# EAGLE board picrocope_hub_v3r1 (EAGLE 9.6.2)
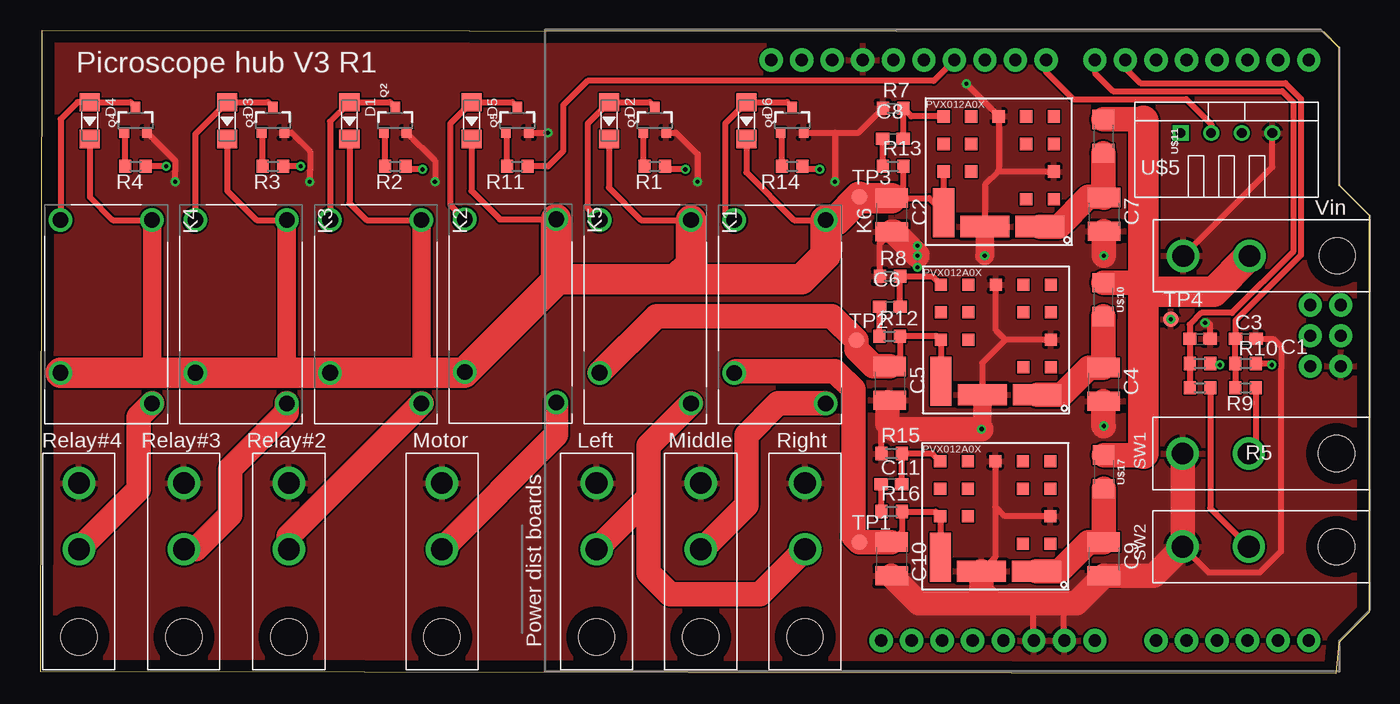
[diagram p0: board, top side]
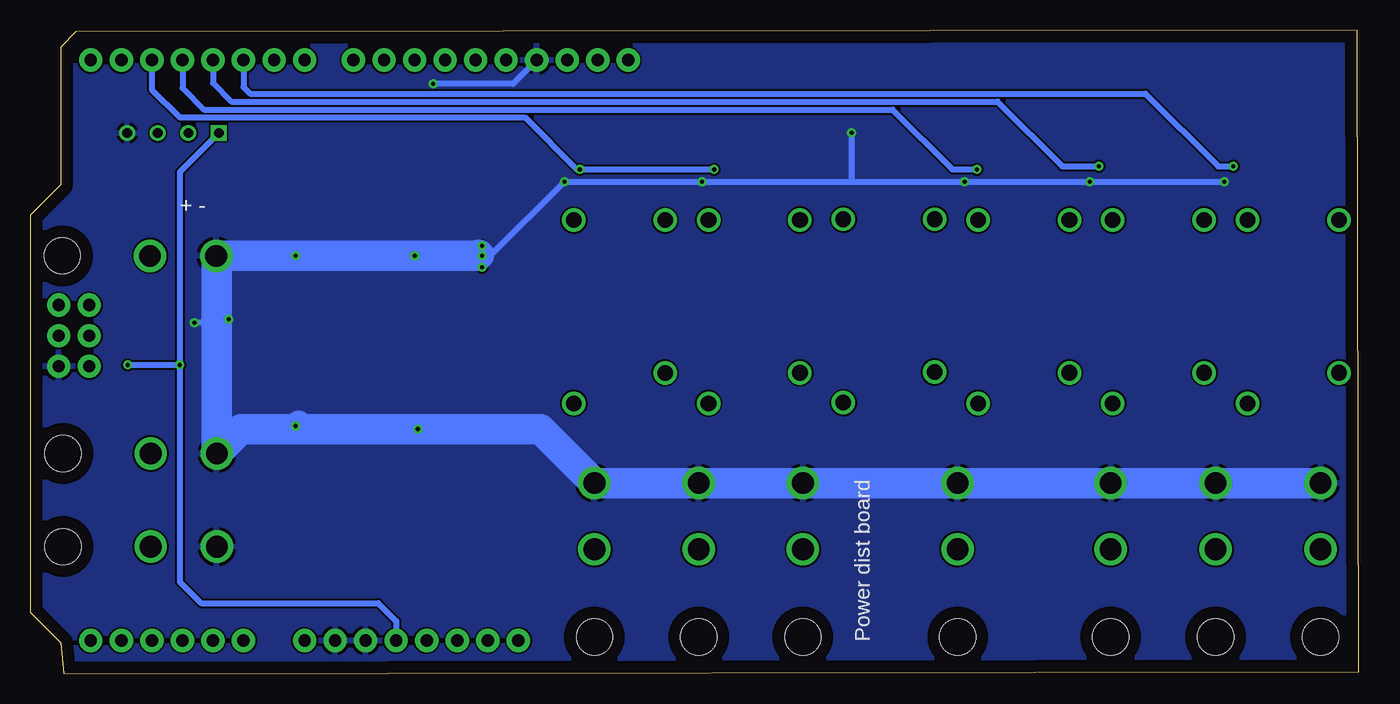
[diagram p1: board, bottom side, seen from below]

Size 110.49 x 53.49 mm. Coordinates in mm from the lower left corner, seen from the top.
Outline: 0,0.15 0.11,53.49 106.68,53.34 107.95,52.07 107.95,40.64 110.49,38.1 110.49,5.08 107.95,2.54 107.7,0 0,0.15
Copper layers (1*16): Top 0.035mm / dielectric 1.5mm / Bottom 0.035mm
Design rules "default *": minimum track width 20mil, minimum drill 0.35mm, track to track 6mil, track to pad 6mil, pad to pad 6mil, via to via 6mil, smd to smd 6mil, copper to edge 40mil, drill to drill 6mil, minimum pad ring 10mil, minimum via ring 8mil, stop-mask expansion 4mil, vias tented up to drill 0mil, thermal gap 10mil

## Footprints (pad centres in the part's own frame; a part is rotated, then mirrored left to right if it is on the bottom)
ARDUINO_R3 = drill 1.016 pad 1.93: 3.3V 2.54,-24.13; 5V 5.08,-24.13; A0 17.78,-24.13; A1 20.32,-24.13; A2 22.86,-24.13; A3 25.4,-24.13; A4 27.94,-24.13; A5 30.48,-24.13; AREF -9.144,24.13; D0 30.48,24.13; D1 27.94,24.13; D2 25.4,24.13; D3 22.86,24.13; D4 20.32,24.13; D5 17.78,24.13; D6 15.24,24.13; D7 12.7,24.13; D8 8.636,24.13; D9 6.096,24.13; D10 3.556,24.13; D11 1.016,24.13; D12 -1.524,24.13; D13 -4.064,24.13; GND@1 7.62,-24.13; GND@2 10.16,-24.13; GND@3 -6.604,24.13; GND@4 33.16,-1.32; IOREF -2.54,-24.13; MISO 30.62,3.76; MOSI 33.16,1.22; NC -5.08,-24.13; RESET@1 0,-24.13; RESET@2 30.62,-1.32; SCK 30.62,1.22; SCL -14.224,24.13; SDA -11.684,24.13; VCC 33.16,3.76; VIN 12.7,-24.13
C0603 = smd 1.1 x 1: 1 -0.85,0; 2 0.85,0
C1210 = smd 1.6 x 2.7: 1 -1.4,0; 2 1.4,0
LL-34 = smd 1.524 x 1.676: A -1.524,0; C 1.524,0
RELAY_2071508-1 = drill 1.3: 1 -7.85,3.8; 2 -7.85,-3.8; 3 7.39,3.8; 4 4.85,-3.8
SOT23-3 = smd 0.8 x 0.9: 1 -0.95,-1; 2 0.95,-1; 3 0,1.1
R0603 = smd 1 x 1.1: 1 -0.85,0; 2 0.85,0
B1,27 = smd 1.27 x 1.27: TP 0,0
PVX012A0X = smd 1.01 x 1.01: 8 3.81,1.52; 9 1.52,1.52; 11 3.81,3.81; 12 8.39,3.81; 13 8.39,6.1; 14 10.68,3.81; 15 8.39,1.52; 16 1.52,8.39; 17 3.81,8.39; GND 6.1,1.52; ON_OFF 1.52,6.1; PGOOD 1.52,3.81; SENSE 10.68,6.1; TRIM 10.68,1.52 | smd 4.07 x 1.77: GRN 7.24,10.67; VIN 2.67,10.67 | smd 1.77 x 4.07: VOUT 10.67,9.53
MINI-FIT_JR_CONN = drill 1.8: P$1 0,0; P$2 0,5.5 | hole 3: 0,-7.3
TEMP-HUM-SENSOR-DHT22 = drill 0.8 square: 1 -3.81,0 | drill 0.8: 2 -1.27,0; 3 1.27,0; 4 3.81,0
1206 = smd 1.6 x 1.8: 1 -1.4,0; 2 1.4,0

## Placement (x,y rotation side)
B1  ARDUINO_UNO_R3  [ARDUINO_R3]  74.96,26.87 0 top
C1  0.1uF  [C0603]  96.39,27.81 0 top
C2  47 uF  [C1210]  70.75,38.13 270 top
C3  0.1uF  [C0603]  100.2,27.81 0 top
C4  47 uF  [C1210]  88.37,24.04 270 top
C5  47 uF  [C1210]  70.59,24.12 270 top
C6  100pF  [C0603]  70.61,30.48 0 top
C7  47 uF  [C1210]  88.4,38.17 270 top
C8  100pF  [C0603]  70.87,44.45 0 top
C9  47 uF  [C1210]  88.39,9.53 270 top
C10  47 uF  [C1210]  70.74,9.53 270 top
C11  100pF  [C0603]  70.74,15.75 0 top
D1  1N4148  [LL-34]  25.65,45.97 270 top
D2  1N4148  [LL-34]  47.24,45.97 270 top
D3  1N4148  [LL-34]  15.49,45.97 270 top
D4  1N4148  [LL-34]  4.06,45.97 270 top
D5  1N4148  [LL-34]  35.81,45.97 270 top
D6  1N4148  [LL-34]  58.67,45.97 270 top
K1  2071508-1  [RELAY_2071508-1]  50.26,29.85 270 top
K2  2071508-1  [RELAY_2071508-1]  27.85,29.85 270 top
K3  2071508-1  [RELAY_2071508-1]  16.64,29.85 270 top
K4  2071508-1  [RELAY_2071508-1]  5.44,29.85 270 top
K5  2071508-1  [RELAY_2071508-1]  39.06,29.91 270 top
K6  2071508-1  [RELAY_2071508-1]  61.47,29.84 270 top
Q1  600mA/40V  [SOT23-3]  51.05,45.97 0 top
Q2  600mA/40V  [SOT23-3]  29.46,45.97 0 top
Q3  600mA/40V  [SOT23-3]  19.3,45.97 0 top
Q4  600mA/40V  [SOT23-3]  7.87,45.97 0 top
Q5  600mA/40V  [SOT23-3]  39.62,45.97 0 top
Q6  600mA/40V  [SOT23-3]  62.48,45.97 0 top
R1  1k  [R0603]  51.05,42.16 180 top
R2  1k  [R0603]  29.46,42.16 180 top
R3  1k  [R0603]  19.3,42.16 180 top
R4  1k  [R0603]  7.87,42.16 180 top
R5  1k  [R0603]  96.39,23.75 180 top
R6  10k  [R0603]  96.39,25.78 0 top
R7  2.727k  [R0603]  70.87,46.99 0 top
R8  2.727k  [R0603]  70.61,33.02 0 top
R9  1k  [R0603]  100.2,23.75 180 top
R10  10k  [R0603]  100.2,25.78 0 top
R11  1k  [R0603]  39.62,42.16 180 top
R12  330  [R0603]  70.58,28.03 0 top
R13  330  [R0603]  70.87,42.16 0 top
R14  1k  [R0603]  62.48,42.16 180 top
R15  2.727k  [R0603]  70.74,18.29 0 top
R16  330  [R0603]  70.74,13.46 0 top
TP1  PTR1B1,27  [B1,27]  68.07,10.92 0 top
TP2  PTR1B1,27  [B1,27]  67.82,27.69 0 top
TP3  PTR1B1,27  [B1,27]  68.07,39.62 0 top
TP4  PTR1B1,27  [B1,27]  93.98,29.46 0 top
U$1  PVX012A0XV1  [PVX012A0X]  85.75,47.83 180 top
U$2  PVX012A0XV1  [PVX012A0X]  85.52,33.84 180 top
U$3  MOLEX_0039301022  [MINI-FIT_JR_CONN]  100.51,34.72 90 top
U$4  PVX012A0XV1  [PVX012A0X]  85.47,19.18 180 top
U$5  TEMP-HUM-SENSOR-DHT22  [TEMP-HUM-SENSOR-DHT22]  98.6,44.94 0 top
U$6  MOLEX_0039301022  [MINI-FIT_JR_CONN]  46.21,10.33 0 top
U$7  MOLEX_0039301022  [MINI-FIT_JR_CONN]  20.62,10.33 0 top
U$8  MOLEX_0039301022  [MINI-FIT_JR_CONN]  11.89,10.33 0 top
U$9  MOLEX_0039301022  [MINI-FIT_JR_CONN]  3.15,10.33 0 top
U$10  PTC_1206  [1206]  88.34,31.09 270 top
U$11  PTC_1206  [1206]  88.35,44.66 270 top
U$12  MOLEX_0039301022  [MINI-FIT_JR_CONN]  54.88,10.33 0 top
U$13  MOLEX_0039301022  [MINI-FIT_JR_CONN]  63.55,10.33 0 top
U$14  MOLEX_0039301022  [MINI-FIT_JR_CONN]  33.35,10.33 0 top
U$15  MOLEX_0039301022  [MINI-FIT_JR_CONN]  100.46,18.29 90 top
U$17  PTC_1206  [1206]  88.39,16.76 270 top
U$18  MOLEX_0039301022  [MINI-FIT_JR_CONN]  100.46,10.54 90 top

## Library data of the parts
B1 = SparkFun-Boards
C1-C11 R7 R8 R12 R13 R15 R16 = adafruit
D1-D6 = Seeed-Diode; MPN: 1N4148
K1-K6 = 2071508-1; MANUFACTURER: TE Connectivity; MAXIMUM_PACKAGE_HEIGHT: 15.7mm; PARTREV: 0919; STANDARD: Manufacturer Recommendations
Q1-Q6 = SparkFun-DiscreteSemi; PROD_ID: TRANS-08049
R1-R6 R9-R11 R14 = resistor
TP1-TP4 = testpad
U$1 U$2 U$4 = PVX012A0X
U$3 U$6-U$15 U$17 U$18 = pat
U$5 = diy-modules

## Nets
5V: B1.5V R6.2 R10.2 U$5.1
DHT_DAT: B1.D8 U$5.2
GND: B1.GND@1 B1.GND@2 B1.GND@3 B1.GND@4 C1.2 C2.2 C3.2 C4.2 C5.2 C7.2 C9.2 C10.2 Q1.2 Q2.2 Q3.2 Q4.2 Q5.2 Q6.2 R7.1 R8.1 R15.1 TP4.TP U$1.GND U$1.GRN U$1.ON_OFF U$2.GND U$2.GRN U$2.ON_OFF U$3.P$2 U$4.GND U$4.GRN U$4.ON_OFF U$5.4 U$6.P$2 U$7.P$2 U$8.P$2 U$9.P$2 U$12.P$2 U$13.P$2 U$14.P$2 U$15.P$2 U$18.P$2
N$1: Q1.1 R1.2
N$2: D2.A K1.2 Q1.3
N$3: U$3.P$1 U$10.1 U$11.1 U$17.1
N$4: R5.1 U$18.P$1
N$5: Q2.1 R2.2
N$6: D1.A K2.2 Q2.3
N$7: Q3.1 R3.2
N$8: D3.A K3.2 Q3.3
N$9: Q4.1 R4.2
N$10: D4.A K4.2 Q4.3
N$12: R9.1 U$15.P$1
N$14: Q5.1 R11.2
N$15: C6.1 R12.1
N$16: C8.1 R13.1
N$17: D5.A K5.2 Q5.3
N$18: Q6.1 R14.2
N$19: C6.2 R8.2 U$2.TRIM
N$20: C8.2 R7.2 U$1.TRIM
N$21: D6.A K6.2 Q6.3
N$23: C11.2 R15.2 U$4.TRIM
N$25: C11.1 R16.1
O2: K2.3 U$7.P$1
O3: K3.3 U$8.P$1
O4: K4.3 U$9.P$1
O_MOTOR: K5.3 U$14.P$1
O_POWER_DIST_1: K1.3 U$6.P$1 U$13.P$1
O_POWER_DIST_2: K6.3 U$12.P$1
P1: B1.D2 R1.1 R14.1
P2: B1.D3 R2.1
P3: B1.D4 R3.1
P4: B1.D5 R4.1
P5: B1.D11 R11.1
SW1: B1.D6 C3.1 R9.2 R10.1
SW2: B1.D7 C1.1 R5.2 R6.1
VIN_1: C7.1 U$1.VIN U$11.2
VIN_2: C4.1 U$2.VIN U$10.2
VIN_3: C9.1 U$4.VIN U$17.2
VO_1: C2.1 D1.C D2.C D3.C D4.C D5.C D6.C K1.1 K2.1 K2.4 K3.1 K3.4 K4.1 K4.4 K5.1 K5.4 K6.1 R13.2 TP3.TP U$1.SENSE U$1.VOUT
VO_2: C5.1 K1.4 R12.2 TP2.TP U$2.SENSE U$2.VOUT
VO_3: C10.1 K6.4 R16.2 TP1.TP U$4.SENSE U$4.VOUT

## Tracks (layer width: path | path; a pad name or v marks a point on that pad's centre or on a via)
5V  (via drill 0.35)
  Top 0.508: R6.2 97.37,25.65 v98.04,25.65 | R10.2 102.23,25.78 v102.36,25.65
  Bottom 0.508: U$5.1 98.04,41.69 v98.04,25.65 | B1.5V 80.04,4.34 81.53,5.84 96.27,5.84 98.04,7.62 v98.04,25.65 | v102.36,25.65 v98.04,25.65
DHT_DAT
  Top 0.508: B1.D8 83.59,50.01 85.85,47.75 95.25,47.75 97.33,45.67 U$5.2
GND  (via drill 0.35)
  Top 0.508: U$2.ON_OFF 80.2,27.75 | U$2.GND 79.42,28.53 80.2,27.75 | 80.2,27.75 78.28,25.82 U$2.GRN | U$1.ON_OFF 79.58,41.73 | U$1.GRN 78.51,40.67 79.58,41.73 | 79.58,41.73 79.65,41.81 U$1.GND 79.65,46.33 v76.96,49.02 | U$4.ON_OFF 80.14,13.08 79.37,13.85 | U$4.GND 79.37,13.85 | 79.37,13.85 79.37,9.65 U$4.GRN | Q6.2 66.04,44.97 | 66.04,44.97 68,44.97 R7.1 | 66.04,44.97 v66.04,40.89 | v11.18,40.89 11.18,41.82 11.2,41.84 11.2,42.6 Q4.2 | Q3.2 20.81,44.97 22.37,43.41 22.37,41.84 22.35,41.82 v22.35,40.89 | Q2.2 32.77,42.62 v32.77,40.89 | Q5.2 41.89,44.97 41.91,44.96 v42.16,44.96 | Q1.2 52.82,44.97 54.61,43.18 v54.61,40.89 | R8.1 69.76,35.74 C2.2 | R15.1 69.89,22.02 70.41,22.55 C5.2 | B1.GND@1 82.55,2.77 82.55,5.84 | B1.GND@2 85.09,2.77 85.09,5.84 | C1.2 97.24,29 97.03,29.21 96.87,29.21 v96.82,29.16 | C3.2 102.49,27.81 103.15,27.16 103.15,25.33 103.12,25.31 103.12,10.16 101.35,8.38 97.12,8.38 U$18.P$2 | U$3.P$2 102.41,42.13 U$5.4
  Top 1.524: U$1.GRN 78.51,34.75 v78.49,34.72 | U$2.GRN 78.28,20.37 v78.23,20.32
  Top 2.032: U$15.P$2 U$18.P$2 92.54,8.12 C9.2 86.11,5.84 85.09,5.84 82.55,5.84 79.25,5.84 | U$4.GRN 78.23,6.86 79.25,5.84 | 79.25,5.84 73.02,5.84 C10.2 | 72.9,34.8 70.96,36.73 C2.2 70.89,36.73 v72.9,34.72 | C7.2 88.4,34.73 v88.39,34.72 | C4.2 88.37,20.6 v88.39,20.57 | v78.23,20.32 70.87,20.32 70.41,20.77 70.41,22.55
  Bottom 0.508: 42.16,40.89 v54.61,40.89 v66.04,40.89 72.21,34.72 v72.9,34.72 73.23,34.72 | 42.16,40.89 v32.77,40.89 v22.35,40.89 v11.18,40.89 | v42.16,44.96 42.16,40.89 | B1.GND@3 70.33,49.02 v76.96,49.02 | v96.82,29.16 96.77,29.21 94.96,29.21 94.7,29.46 TP4.TP
  Bottom 2.032: v88.39,20.57 88.14,20.83 88.14,20.32
  Bottom 2.54: U$9.P$2 U$8.P$2 U$7.P$2 U$14.P$2 U$6.P$2 U$12.P$2 U$13.P$2 68.04,20.32 v78.23,20.32 88.14,20.32 92.92,20.32 U$15.P$2 94.96,29.21 94.96,34.67 U$3.P$2 v88.39,34.72 v78.49,34.72 73.23,34.72 73.15,34.8
  other vias: 93.98,29.46
  pour Top: -3.85,55.88 -3.85,-5.08 113.03,-5.08 113.03,55.88
  pour Bottom: -3.85,55.88 -3.85,-5.08 113.03,-5.08 113.03,55.88
N$1
  Top 0.508: R1.2 50.1,42.26 Q1.1
N$2
  Top 0.508: Q1.3 50.63,47.5 D2.A 45.47,45.72 45.47,38.7 K1.2
N$3
  Top 2.032: U$11.1 91.61,46.06 91.69,45.97 | U$10.1 90.95,32.49 91.69,31.75 | U$17.1 91.57,18.16 91.69,18.29
  Top 2.54: U$3.P$1 97.54,31.75 91.69,31.75 | 91.69,45.97 91.69,31.75 | 91.69,18.29 91.69,31.75
N$4
  Top 0.508: R5.1 97.24,13.76 U$18.P$1
N$5
  Top 0.508: R2.2 28.61,44.87 Q2.1
N$6
  Top 0.508: Q2.3 29.04,47.5 D1.A 24.05,45.89 K2.2
N$7
  Top 0.508: R3.2 18.45,44.87 Q3.1
N$8
  Top 0.508: Q3.3 18.88,47.5 D3.A 12.84,44.85 K3.2
N$9
  Top 0.508: R4.2 7.02,44.87 Q4.1
N$10
  Top 0.508: Q4.3 7.45,47.5 D4.A 3.05,47.5 1.64,46.09 K4.2
N$11  (via drill 0.35)
  other vias: 72.9,35.56
N$12
  Top 0.508: R9.1 101.05,18.88 U$15.P$1
N$13  (via drill 0.35)
  other vias: 72.9,33.78
N$14
  Top 0.508: R11.2 38.77,44.87 Q5.1
N$15
  Top 0.508: R12.1 69.73,30.45 C6.1
N$16
  Top 0.508: R13.1 C8.1
N$17
  Top 0.508: Q5.3 39.2,47.5 D5.A 34.04,45.72 34.04,38.98 K5.2
N$18
  Top 0.508: R14.2 61.63,44.87 Q6.1
N$19
  Top 0.508: C6.2 R8.2 74.15,33.02 U$2.TRIM
N$20
  Top 0.508: C8.2 R7.2 72.39,46.31 U$1.TRIM
N$21
  Top 0.508: Q6.3 62.06,47.5 D6.A 56.9,45.72 56.9,38.47 K6.2
N$23
  Top 0.508: C11.2 R15.2 74.16,18.29 U$4.TRIM
N$25
  Top 0.508: R16.1 C11.1
O2
  Top 2.032: K2.3 20.62,11.43 U$7.P$1
O3
  Top 2.032: K3.3 20.44,21.71 15.75,17.02 15.75,13.21 12.87,10.33 U$8.P$1
O4
  Top 2.032: U$9.P$1 8.13,15.3 8.13,21.35 K4.3
O_MOTOR
  Top 2.032: K5.3 42.85,19.83 U$14.P$1
O_POWER_DIST_1
  Top 2.032: K1.3 50.55,18.95 50.55,14.66 | U$6.P$1 50.55,14.66 | 50.55,14.66 50.55,8.38 52.32,6.6 59.82,6.6 U$13.P$1
O_POWER_DIST_2
  Top 2.032: K6.3 61.32,22.45 58.67,19.81 58.67,13.97 55.03,10.33 U$12.P$1
P1  (via drill 0.35)
  Top 0.508: v64.77,41.91 63.59,41.91 R14.1 | v53.59,41.91 52.16,41.91 R1.1
  Bottom 0.508: B1.D2 100.36,48.54 98.04,46.23 69.34,46.23 65.02,41.91 v64.77,41.91 v53.59,41.91
P2  (via drill 0.35)
  Top 0.508: v31.75,41.91 30.57,41.91 R2.1
  Bottom 0.508: B1.D3 97.82,48.69 96.01,46.89 38.76,46.89 33.78,41.91 v31.75,41.91
P3  (via drill 0.35)
  Top 0.508: v21.59,42.16 R3.1
  Bottom 0.508: B1.D4 95.28,49.1 93.73,47.55 30.02,47.55 24.64,42.16 v21.59,42.16
P4  (via drill 0.35)
  Top 0.508: v10.41,42.16 R4.1
  Bottom 0.508: B1.D5 92.74,48.74 92.2,48.21 17.73,48.21 11.68,42.16 v10.41,42.16
P5
  Top 0.508: B1.D11 74.25,49.28 45.47,49.28 43.43,47.24 43.43,43.43 42.16,42.16 R11.1
SW1
  Top 0.508: B1.D6 90.2,50.32 91.44,49.07 103.5,49.07 104.8,47.77 104.8,34.78 99.35,29.33 C3.1 R10.1 R9.2
SW2
  Top 0.508: B1.D7 87.66,49.91 89.15,48.41 103.23,48.41 104.14,47.5 104.14,35.05 99.06,29.97 96.52,29.97 95.54,29 C1.1 R6.1 R5.2
VIN_1
  Top 2.032: U$11.2 88.35,39.62 | 88.35,39.62 C7.1 | U$1.VIN 84.66,37.16 87.12,39.62 88.35,39.62
VIN_2
  Top 2.032: U$2.VIN 84.9,23.18 87.16,25.44 C4.1 88.37,29.66 U$10.2
VIN_3
  Top 2.032: U$4.VIN 84.71,8.51 87.12,10.93 C9.1 U$17.2
VO_1
  Top 0.508: U$1.SENSE 75.07,38.31 U$1.VOUT 73.85,39.53 C2.1 71.72,40.49 R13.2 | D6.C 58.67,41.66 62.63,37.7 K6.1 | K1.1 49.93,37.7 47.24,40.39 D2.C | D5.C 35.81,40.13 38.18,37.76 K5.1 | D1.C 25.65,39.12 27.07,37.7 K2.1 | D3.C 15.49,40.13 17.92,37.7 K3.1 | D4.C 4.06,39.62 5.99,37.7 K4.1
  Top 1.524: K4.1 9.24,25.09 9.14,25 | K3.1 20.44,25.38 20.07,25 | K2.1 31.65,25.41 31.24,25
  Top 2.54: K4.4 9.14,25 K3.4 20.07,25 K2.4 31.24,25 35.19,25 K5.4 42.85,32.66 | 42.85,32.66 K5.1 | 42.85,32.66 42.96,32.77 52.83,32.77 | 52.83,32.77 54.06,34 K1.1 | 52.83,32.77 63.25,32.77 65.27,34.79 K6.1 66.14,37.7 TP3.TP 68.16,39.53 C2.1
VO_2
  Top 0.508: C5.1 71.43,26.37 R12.2 74.56,28.03 U$2.SENSE 74.84,25.23 74.93,25.15 74.93,24.39 U$2.VOUT
  Top 2.032: K1.4 51.18,29.72 65.79,29.72 TP2.TP 67.82,26.96 69.26,25.52 C5.1
VO_3
  Top 0.508: U$4.VOUT U$4.SENSE 74.41,13.46 R16.2 71.59,11.78 C10.1
  Top 2.032: C10.1 TP1.TP 67.56,11.43 67.56,23.62 66.04,25.15 57.82,25.15 K6.4

## Text on the board
tPlace: Picroscope hub V3 R1 | Vin | Relay#4 | Relay#3 | Relay#2 | Motor | Left | Middle | Right | SW1 | Power dist boards | SW2
bPlace: - + | - + | Power dist board